# Altium PCB 会车驱动.PcbDoc (part 1 of 2)
Units mil, origin at the board's own origin, x right, y up, seen from the top; angles counter-clockwise.
Board outline 3149.61 x 2559.06 mil, 2 copper layers (Top Layer, Bottom Layer); 71 components, 50 nets, 207 pads, 87 vias.
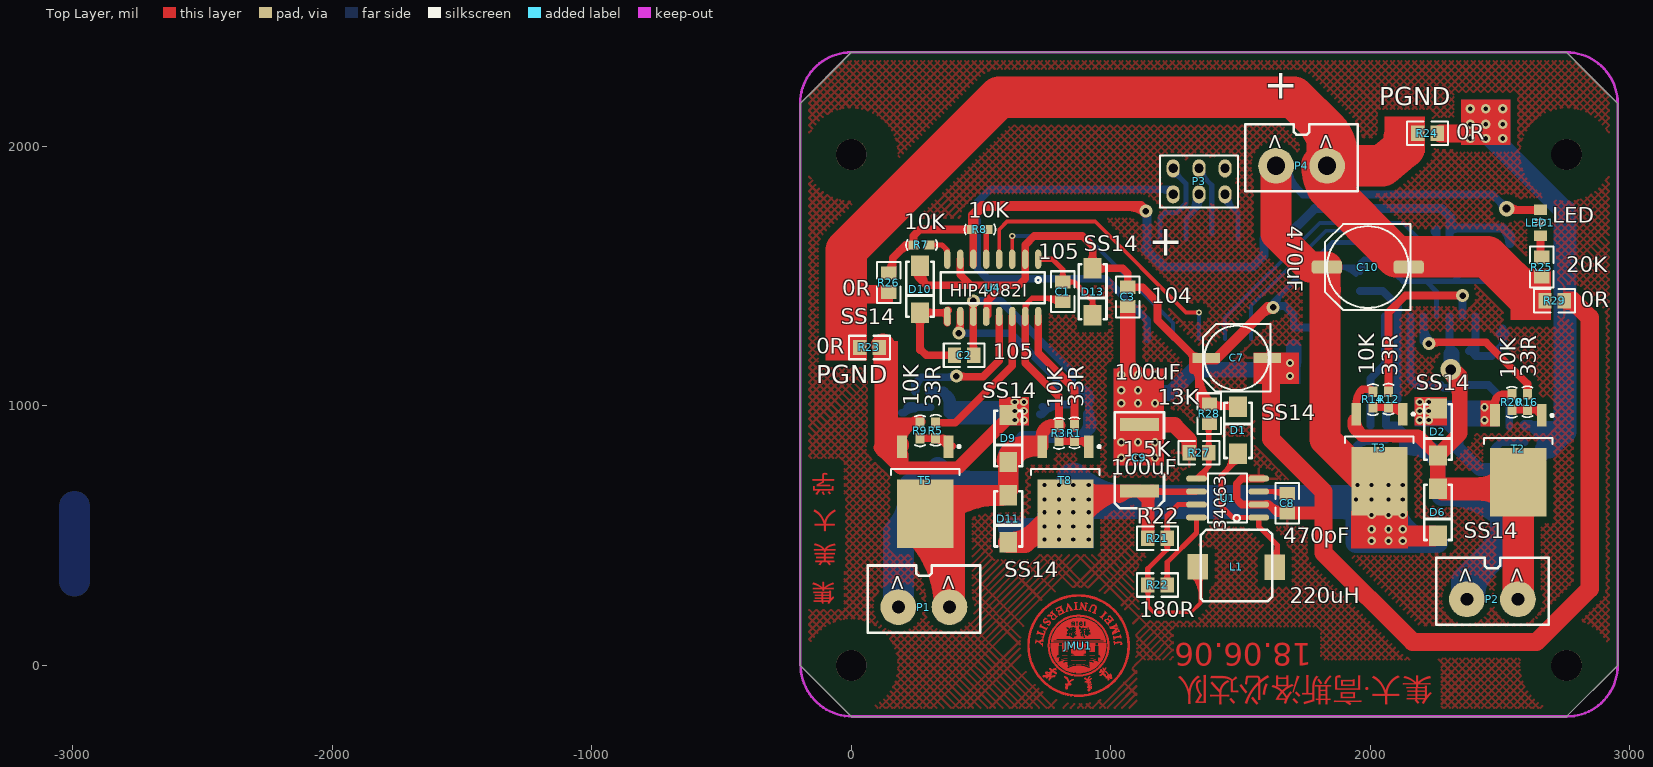
[diagram p0: Top Layer view]
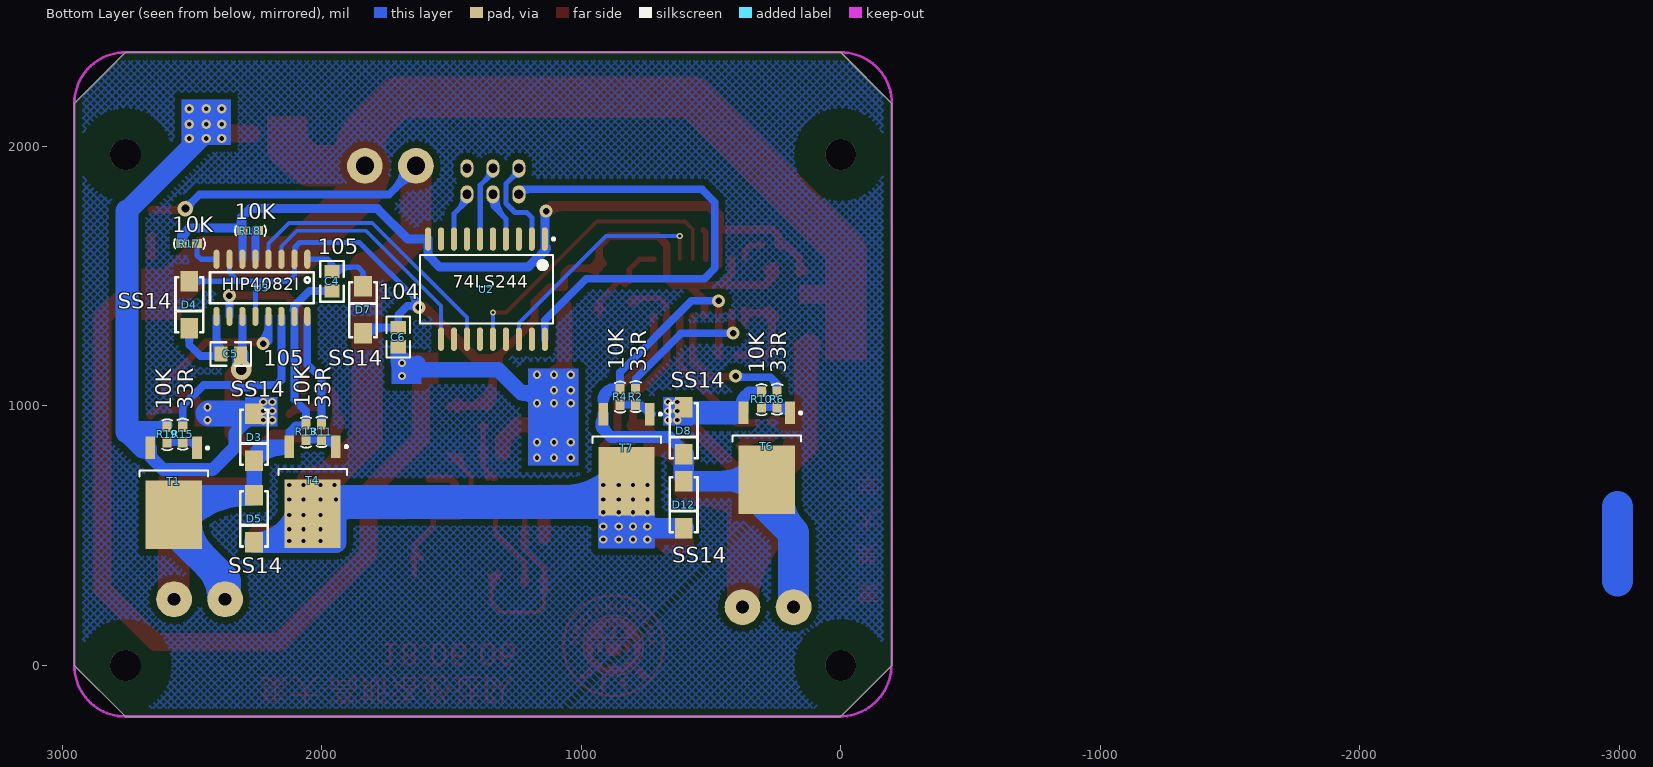
[diagram p1: Bottom Layer view, seen from below]
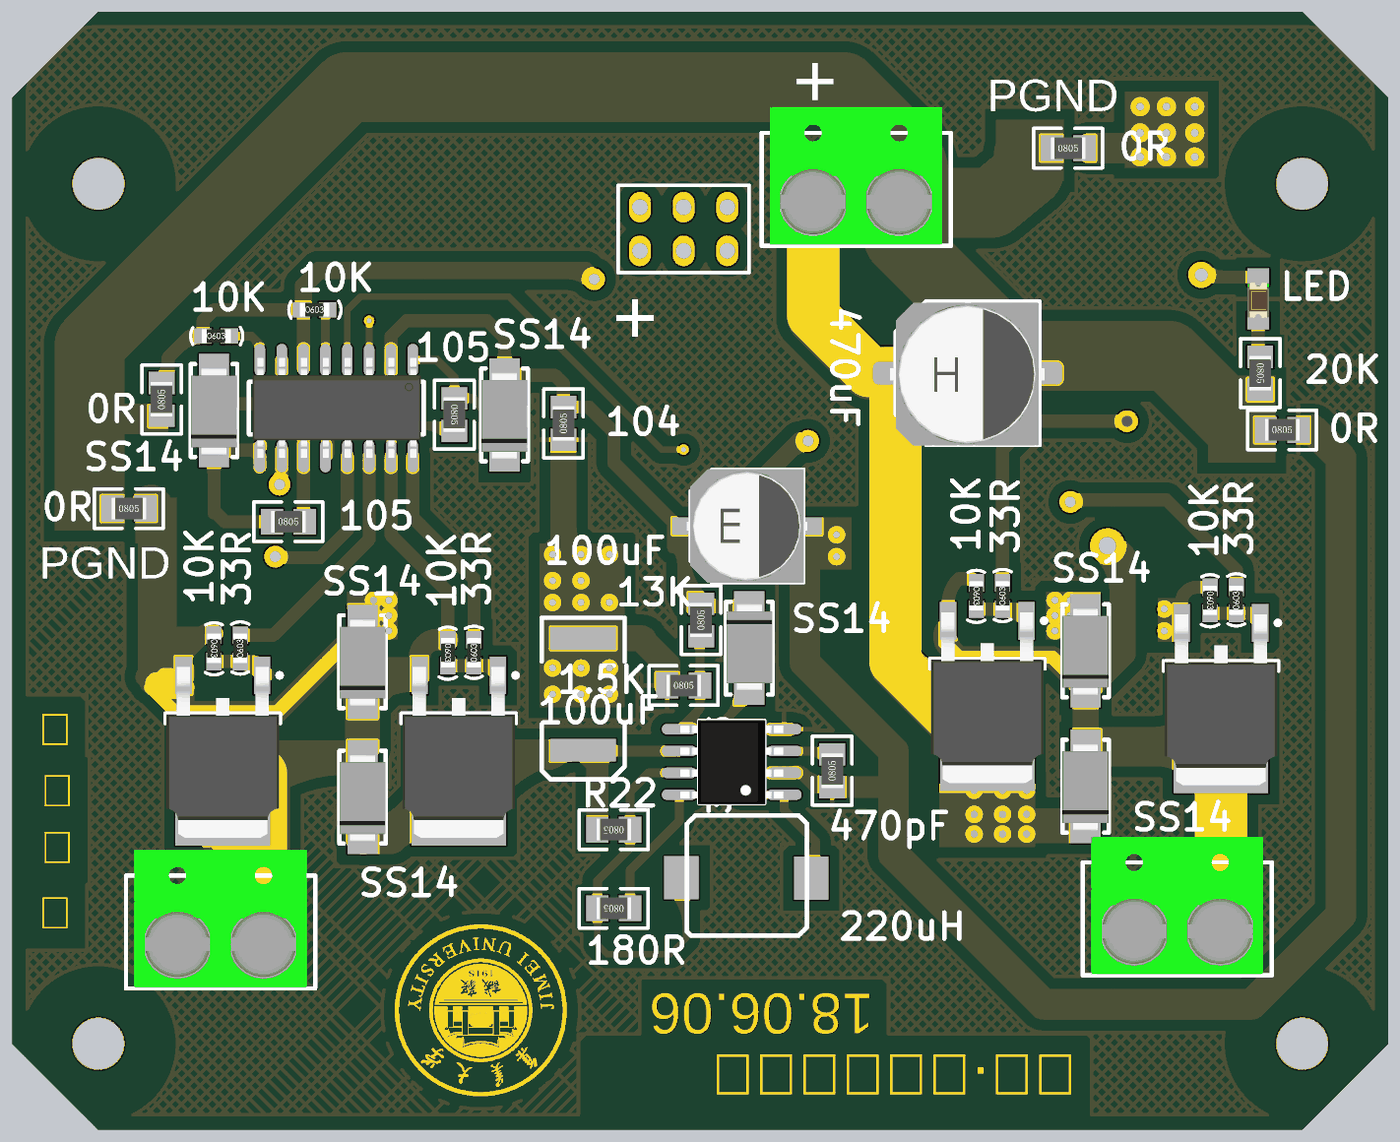
[diagram p3: 3D render of the assembled board from above, using the file's embedded part models]
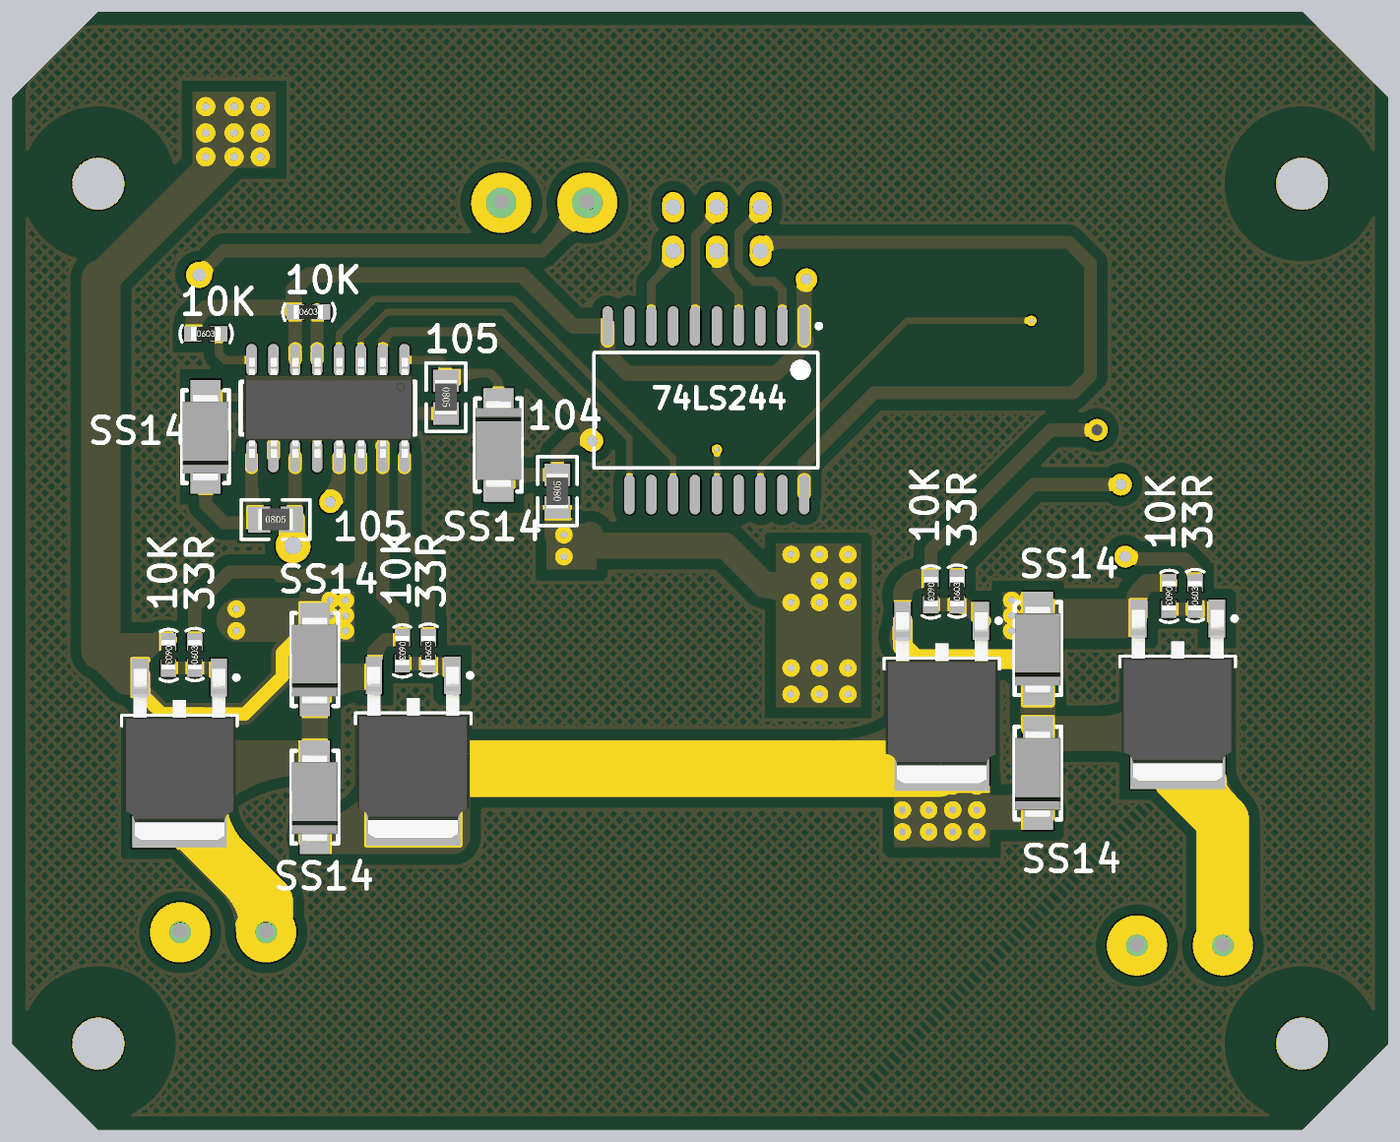
[diagram p4: 3D render of the assembled board from below, using the file's embedded part models]

## Layer stack, top to bottom
Top Layer: signal copper 1.4
Dielectric: dielectric 12.6, FR-4, Dk 4.8
Bottom Layer: signal copper 1.4

## Board outline
2755.91,-196.85 2952.76,0 2952.76,2165.35 2755.91,2362.2 0,2362.2 -196.85,2165.35 -196.85,0 0,-196.85

## Design rules (kind name [scope] priority, off if disabled: settings)
Clearance hold [HasPad('free-1') or HasPad('free-2')  or HasPad('free-3') oR HasPad('free-4') vs inpolygon] p1: gap=118.11
Clearance inpolygon [inpolygon] p2: gap=25
Clearance main_road_clearance [InNetClass('POWER_OR_GND')] p3: gap=15
Clearance [All] p4: gap=10
PolygonConnect PGND2 [InNet('PGND2')] p1: connectstyle=Direct reliefconductorwidth=10 reliefentries=4 polygonreliefangle="90 Angle"
PolygonConnect PGND1 [InNet('PGND1')] p2: connectstyle=Direct reliefconductorwidth=10 reliefentries=4 polygonreliefangle="90 Angle"
PolygonConnect [All] p3: connectstyle=Relief reliefconductorwidth=10 reliefentries=4 polygonreliefangle="90 Angle"
RoutingVias [All] p1: holewidth=28 width=50 viastyle="Through Hole" minholewidth=16 minwidth=32 maxholewidth=50 maxwidth=90
SilkscreenOverComponentPads [IsPad] p1: minsilkscreentomaskgap=10
SolderMaskExpansion [All] p1: expansion=4
Width main_road_width [InNetClass('POWER_OR_GND')] p1: maxlimit=170 minlimit=20 preferedwidth=80
Width [All] p2: maxlimit=30 minlimit=10 preferedwidth=15
27 further rules are at their usual default settings.

## Classes and differential pairs
net class POWER_OR_GND: 5V 7.2V 12V AGND DGND GND M1 M2 M3 M4 PGND1 PGND2

## Components (designator, comment, footprint, x,y, rotation, side; value= is the part's Value field where it differs from the comment)
C1 "105" 0805 815,1440 r270 top
C2 "105" 0805 435,1195 r0 top
C3 "104" 0805 1065,1420 r90 top
C4 "105" 0805 1960,1480 r270 bottom
C5 "105" 0805 2350,1200 r180 bottom
C6 "104" 0805 1705,1265 r90 bottom
C7 "100uF" ED6.3 1485,1185 r0 top
C8 "470pF" 0805 1680,625 r90 top
C9 "100uF" "Pol Cap(220uF)" 1110,800 r90 top
C10 "470uF" ED8 1990,1535 r0 top
D1 "SS14" 二极管 1490,910 r90 top
D2 "SS14" 二极管 2260,895 r270 top
D3 "SS14" 二极管 2260,875 r270 bottom
D4 "SS14" 二极管 2510,1385 r270 bottom
D5 "SS14" 二极管 2260,560 r270 bottom
D6 "SS14" 二极管 2260,585 r270 top
D7 "SS14" 二极管 1840,1375 r90 bottom
D8 "SS14" 二极管 605,900 r270 bottom
D9 "SS14" 二极管 605,870 r270 top
D10 "SS14" 二极管 265,1445 r270 top
D11 "SS14" 二极管 605,560 r270 top
D12 "SS14" 二极管 605,615 r270 bottom
D13 "SS14" 二极管 930,1435 r270 top
JMU1 "JMU" JMU_logo（1） 875,75 r180 top
L1 "220uH" 电感（220uh） 1485,385 r0 top
LED1 "LED" LED(0805) 2655,1705 r270 top
P1 "*" 接线端子#1 280,225 r180 top
P2 "*" 接线端子#1 2470,255 r180 top
P3 "Header 3X2" HDR2X3 1240,1815 r0 top
P4 "*" 接线端子#2 1735,1925 r180 top
R1 "33R" 0603 860,895 r90 top
R2 "33R" 0603 790,1035 r90 bottom
R3 "10K" 0603 800,895 r270 top
R4 "10K" 0603 850,1035 r270 bottom
R5 "33R" 0603 325,905 r90 top
R6 "33R" 0603 245,1025 r90 bottom
R7 "10K" 0603 270,1620 r0 top
R8 "10K" 0603 495,1680 r0 top
R9 "10K" 0603 265,905 r270 top
R10 "10K" 0603 305,1025 r270 bottom
R11 "33R" 0603 2000,900 r90 bottom
R12 "33R" 0603 2070,1025 r90 top
R13 "10K" 0603 2060,900 r270 bottom
R14 "10K" 0603 2010,1025 r270 top
R15 "33R" 0603 2535,890 r90 bottom
R16 "33R" 0603 2605,1015 r90 top
R17 "10K" 0603 2510,1625 r180 bottom
R18 "10K" 0603 2275,1675 r180 bottom
R19 "10K" 0603 2595,890 r270 bottom
R20 "10K" 0603 2545,1015 r270 top
R21 "R22" 0805 1180,490 r180 top
R22 "180R" 0805 1180,310 r180 top
R23 "0R" 0805 70,1225 r0 top
R24 "0R" 0805 2220,2050 r0 top
R25 "20K" 0805 2660,1535 r270 top
R26 "0R" 0805 145,1475 r90 top
R27 "1.5K" 0805 1340,820 r0 top
R28 "13K" 0805 1380,970 r90 top
R29 "0R" 0805 2710,1405 r0 top
T1 "IRLR7843" IRLR7843(MOS) 2550,620 r270 bottom
T2 "IRLR7843" IRLR7843(MOS) 2590,745 r270 top
T3 "IRLR7843" IRLR7843(MOS) 2055,750 r270 top
T4 "IRLR7843" IRLR7843(MOS) 2015,625 r270 bottom
T5 "IRLR7843" IRLR7843(MOS) 305,625 r270 top
T6 "IRLR7843" IRLR7843(MOS) 265,755 r270 bottom
T7 "IRLR7843" IRLR7843(MOS) 805,750 r270 bottom
T8 "IRLR7843" IRLR7843(MOS) 845,625 r270 top
U1 "34063" MA34063 1445,640 r180 top
U2 "74LS244" 74LS244D 1365,1450 r270 bottom
U3 "HIP4082I" HIP4082I 2215,1455 r270 bottom
U4 "HIP4082I" HIP4082I 560,1455 r270 top

## Footprints (in the part's own frame and the unit in brackets; to place one, negate y for a bottom-side part, rotate by r counter-clockwise, add the part's x,y. Pads: shape width x height; smd on the part's side, far side on the other; paste and mask are expansions set on the pad)
74LS244D [mm]
  oval 2.3x0.6 smd: 1(-4.9,5.715) 2(-4.9,4.445) 3(-4.9,3.175) 4(-4.9,1.905) 5(-4.9,0.635) 6(-4.9,-0.635) 7(-4.9,-1.905) 8(-4.9,-3.175) 9(-4.9,-4.445) 10(-4.9,-5.715) 12(4.9,-4.445) 13(4.9,-3.175) 14(4.9,-1.905) 15(4.9,-0.635) 16(4.9,0.635) 17(4.9,1.905) 18(4.9,3.175) 19(4.9,4.445) 20(4.9,5.715)
  silkscreen extent -5.02,-6.5 3.35,6.69, body extent -3.8,-6.5 3.8,6.5, height 2.65
0603 [mil]
  rect 40x35 smd: 1(-30,0) 2(30,0)
  silkscreen extent -59,-20 61,20, body extent -33,-16 33,16, height 22
0805 [mm]
  rect 1.3x1.5 smd: 1(-0.95,0) 2(0.95,0)
  silkscreen extent -2,-1.15 2,1.15, body extent -1,-0.63 1,0.63, height 0.55
ED6.3 [mm]
  rect 2.7x1 smd: 1(-3,0) 2(3,0)
  silkscreen extent -3.3,-3.3 3.3,3.3, body extent -3.5,-3.3 3.5,3.3, height 5.2
ED8 [mm]
  rrect50% 3x1.3 smd: 1(-4,0) 2(4,0)
  silkscreen extent -4.2,-4.2 4.2,4.2, body extent -4.52,-4.22 4.48,4.08, height 10.5
HDR2X3 [mil] "Connector; Heade"
  oval 50x70 hole 36: 1(0,0) 2(0,100) 3(100,0) 4(100,100) 5(200,0) 6(200,100)
  silkscreen extent -50,-50 250,150
HIP4082I [mil]
  oval 74x24 smd: 1(-110,160) 2(-110,110) 3(-110,60) 4(-110,10) 5(-110,-40) 6(-110,-90) 7(-110,-140) 8(-110,-190) 9(110,-190) 10(110,-140) 11(110,-90) 12(110,-40) 13(110,10) 14(110,60) 15(110,110) 16(110,160)
  silkscreen extent -60,-215 60,185, body extent -115,-207 113,179, height 69
IRLR7843(MOS) [mm]
  rect 2.2x0.95 smd: 1(-5.543,1.772) 3(-5.543,-2.788)
  rect 6.7x5.5 smd: 2(1.007,-0.508)
  silkscreen extent -5.67,-3.86 -2.74,2.92, body extent -6.04,-3.78 3.9,2.76, height 2.39
JMU_logo（1） [mil]
  Top Layer region: 917 vertices and 1 holes, not listed, extent -197.2,-197.9 195.8,195.1
  Top Layer region: 557 vertices and 1 holes, not listed, extent -119.2,-119.9 117.8,117.1
  Top Layer region: 309 vertices and 19 holes, not listed, extent -107.2,-10.9 105.8,105.1
  Top Layer region: 261 vertices and 22 holes, not listed, extent -106.2,-107.9 104.8,-13.9
  Top Layer region: 251 vertices and 0 holes, not listed, extent 83.8,85.1 136.8,124.1
  Top Layer region: 219 vertices and 1 holes, not listed, extent -130.2,83.1 -83.2,132.1
  Top Layer region: 241 vertices and 4 holes, not listed, extent -52.2,117.1 -25.2,174.1
  Top Layer region: 155 vertices and 0 holes, not listed, extent 18.8,117.1 55.8,167.1
  Top Layer region: 195 vertices and 0 holes, not listed, extent -160.2,-85.9 -119.2,-42.9
  Top Layer region: 139 vertices and 1 holes, not listed, extent 79.8,-134.9 119.8,-100.9
  Top Layer region: -29.2,-136.9 -24.2,-136.9 -24.2,-137.9 -23.2,-137.9 -23.2,-139.9 -22.2,-139.9 -22.2,-141.9 -21.2,-141.9 -21.2,-142.9 -20.2,-142.9 -20.2,-144.9 -19.2,-144.9 -19.2,-145.9 -18.2,-145.9 -18.2,-147.9 -17.2,-147.9 -17.2,-149.9 -16.2,-149.9 -16.2,-150.9 -15.2,-150.9 -15.2,-152.9 -14.2,-152.9 -14.2,-154.9 -13.2,-154.9 -13.2,-155.9 -12.2,-155.9 -12.2,-157.9 -11.2,-157.9 -11.2,-149.9 -10.2,-149.9 -10.2,-140.9 -13.2,-140.9 -13.2,-138.9 -6.2,-138.9 -6.2,-139.9 -2.2,-139.9 -2.2,-140.9 -3.2,-140.9 -3.2,-141.9 -6.2,-141.9 -6.2,-143.9 -7.2,-143.9 -7.2,-149.9 -8.2,-149.9 -8.2,-157.9 -9.2,-157.9 -9.2,-165.9 -10.2,-165.9 -10.2,-167.9 -12.2,-167.9 -12.2,-165.9 -13.2,-165.9 -13.2,-164.9 -14.2,-164.9 -14.2,-162.9 -15.2,-162.9 -15.2,-161.9 -16.2,-161.9 -16.2,-159.9 -17.2,-159.9 -17.2,-157.9 -18.2,-157.9 -18.2,-156.9 -19.2,-156.9 -19.2,-154.9 -20.2,-154.9 -20.2,-153.9 -21.2,-153.9 -21.2,-151.9 -22.2,-151.9 -22.2,-149.9 -23.2,-149.9 -23.2,-147.9 -24.2,-147.9 -24.2,-146.9 -25.2,-146.9 -25.2,-144.9 -26.2,-144.9 -26.2,-148.9 -27.2,-148.9 -27.2,-156.9 -28.2,-156.9 -28.2,-163.9 -25.2,-163.9 -25.2,-165.9 -33.2,-165.9 -33.2,-164.9 -36.2,-164.9 -36.2,-163.9 -35.2,-163.9 -35.2,-162.9 -32.2,-162.9 -32.2,-161.9 -31.2,-161.9 -31.2,-156.9 -30.2,-156.9 -30.2,-148.9 -29.2,-148.9 -29.2,-141.9 -28.2,-141.9 -28.2,-140.9 -29.2,-140.9 -29.2,-138.9 -31.2,-138.9 -31.2,-137.9 -32.2,-137.9 -32.2,-135.9 -29.2,-135.9
  Top Layer region: 177 vertices and 0 holes, not listed, extent 51.8,-154.9 86.8,-118.9
  Top Layer region: 215 vertices and 0 holes, not listed, extent -137.2,-116.9 -100.2,-79.9
  Top Layer region: -65.2,-124.9 -63.2,-124.9 -63.2,-125.9 -60.2,-125.9 -60.2,-126.9 -58.2,-126.9 -58.2,-127.9 -55.2,-127.9 -55.2,-128.9 -54.2,-128.9 -54.2,-130.9 -56.2,-130.9 -56.2,-129.9 -58.2,-129.9 -58.2,-130.9 -59.2,-130.9 -59.2,-132.9 -60.2,-132.9 -60.2,-135.9 -61.2,-135.9 -61.2,-138.9 -62.2,-138.9 -62.2,-140.9 -63.2,-140.9 -63.2,-143.9 -64.2,-143.9 -64.2,-146.9 -65.2,-146.9 -65.2,-151.9 -64.2,-151.9 -64.2,-152.9 -63.2,-152.9 -63.2,-153.9 -62.2,-153.9 -62.2,-154.9 -60.2,-154.9 -60.2,-155.9 -54.2,-155.9 -54.2,-154.9 -53.2,-154.9 -53.2,-153.9 -52.2,-153.9 -52.2,-152.9 -51.2,-152.9 -51.2,-151.9 -50.2,-151.9 -50.2,-149.9 -49.2,-149.9 -49.2,-146.9 -48.2,-146.9 -48.2,-143.9 -47.2,-143.9 -47.2,-141.9 -46.2,-141.9 -46.2,-138.9 -45.2,-138.9 -45.2,-134.9 -46.2,-134.9 -46.2,-133.9 -47.2,-133.9 -47.2,-131.9 -45.2,-131.9 -45.2,-132.9 -42.2,-132.9 -42.2,-133.9 -40.2,-133.9 -40.2,-134.9 -37.2,-134.9 -37.2,-136.9 -41.2,-136.9 -41.2,-137.9 -42.2,-137.9 -42.2,-139.9 -43.2,-139.9 -43.2,-141.9 -44.2,-141.9 -44.2,-144.9 -45.2,-144.9 -45.2,-147.9 -46.2,-147.9 -46.2,-149.9 -47.2,-149.9 -47.2,-151.9 -48.2,-151.9 -48.2,-153.9 -49.2,-153.9 -49.2,-155.9 -51.2,-155.9 -51.2,-156.9 -52.2,-156.9 -52.2,-157.9 -54.2,-157.9 -54.2,-158.9 -60.2,-158.9 -60.2,-157.9 -63.2,-157.9 -63.2,-156.9 -65.2,-156.9 -65.2,-155.9 -67.2,-155.9 -67.2,-154.9 -68.2,-154.9 -68.2,-153.9 -69.2,-153.9 -69.2,-151.9 -70.2,-151.9 -70.2,-144.9 -69.2,-144.9 -69.2,-141.9 -68.2,-141.9 -68.2,-138.9 -67.2,-138.9 -67.2,-136.9 -66.2,-136.9 -66.2,-133.9 -65.2,-133.9 -65.2,-130.9 -64.2,-130.9 -64.2,-126.9 -66.2,-126.9 -66.2,-123.9 -65.2,-123.9
  Top Layer region: 138.8,-0.9 139.8,-0.9 139.8,-3.9 140.8,-3.9 140.8,-4.9 142.8,-4.9 142.8,-5.9 143.8,-5.9 143.8,-6.9 144.8,-6.9 144.8,-7.9 145.8,-7.9 145.8,-8.9 147.8,-8.9 147.8,-9.9 148.8,-9.9 148.8,-10.9 149.8,-10.9 149.8,-11.9 150.8,-11.9 150.8,-12.9 152.8,-12.9 152.8,-13.9 160.8,-13.9 160.8,-14.9 162.8,-14.9 162.8,-13.9 163.8,-13.9 163.8,-10.9 165.8,-10.9 165.8,-15.9 164.8,-15.9 164.8,-23.9 162.8,-23.9 162.8,-20.9 161.8,-20.9 161.8,-19.9 156.8,-19.9 156.8,-18.9 151.8,-18.9 151.8,-19.9 149.8,-19.9 149.8,-20.9 147.8,-20.9 147.8,-21.9 145.8,-21.9 145.8,-22.9 143.8,-22.9 143.8,-23.9 142.8,-23.9 142.8,-24.9 140.8,-24.9 140.8,-25.9 138.8,-25.9 138.8,-26.9 137.8,-26.9 137.8,-27.9 136.8,-27.9 136.8,-29.9 134.8,-29.9 134.8,-21.9 135.8,-21.9 135.8,-16.9 137.8,-16.9 137.8,-19.9 139.8,-19.9 139.8,-18.9 141.8,-18.9 141.8,-17.9 143.8,-17.9 143.8,-16.9 145.8,-16.9 145.8,-15.9 147.8,-15.9 147.8,-14.9 148.8,-14.9 148.8,-13.9 147.8,-13.9 147.8,-12.9 146.8,-12.9 146.8,-11.9 144.8,-11.9 144.8,-10.9 143.8,-10.9 143.8,-9.9 142.8,-9.9 142.8,-8.9 140.8,-8.9 140.8,-7.9 138.8,-7.9 138.8,-9.9 136.8,-9.9 136.8,-3.9 137.8,-3.9 137.8,0.1 138.8,0.1
  Top Layer region: 114.8,-79.9 116.8,-79.9 116.8,-80.9 118.8,-80.9 118.8,-81.9 120.8,-81.9 120.8,-83.9 112.8,-83.9 112.8,-84.9 111.8,-84.9 111.8,-85.9 110.8,-85.9 110.8,-86.9 109.8,-86.9 109.8,-89.9 110.8,-89.9 110.8,-90.9 111.8,-90.9 111.8,-91.9 116.8,-91.9 116.8,-90.9 118.8,-90.9 118.8,-89.9 120.8,-89.9 120.8,-88.9 123.8,-88.9 123.8,-87.9 131.8,-87.9 131.8,-88.9 132.8,-88.9 132.8,-89.9 133.8,-89.9 133.8,-90.9 134.8,-90.9 134.8,-91.9 135.8,-91.9 135.8,-99.9 134.8,-99.9 134.8,-100.9 133.8,-100.9 133.8,-102.9 132.8,-102.9 132.8,-103.9 131.8,-103.9 131.8,-104.9 129.8,-104.9 129.8,-107.9 127.8,-107.9 127.8,-106.9 125.8,-106.9 125.8,-105.9 123.8,-105.9 123.8,-104.9 120.8,-104.9 120.8,-102.9 128.8,-102.9 128.8,-101.9 130.8,-101.9 130.8,-100.9 131.8,-100.9 131.8,-99.9 132.8,-99.9 132.8,-95.9 131.8,-95.9 131.8,-93.9 128.8,-93.9 128.8,-92.9 126.8,-92.9 126.8,-93.9 123.8,-93.9 123.8,-94.9 121.8,-94.9 121.8,-95.9 119.8,-95.9 119.8,-96.9 115.8,-96.9 115.8,-97.9 113.8,-97.9 113.8,-96.9 110.8,-96.9 110.8,-95.9 109.8,-95.9 109.8,-94.9 108.8,-94.9 108.8,-93.9 107.8,-93.9 107.8,-91.9 106.8,-91.9 106.8,-87.9 107.8,-87.9 107.8,-85.9 108.8,-85.9 108.8,-83.9 109.8,-83.9 109.8,-82.9 110.8,-82.9 110.8,-81.9 112.8,-81.9 112.8,-78.9 114.8,-78.9
  Top Layer region: 48.8,-132.9 47.8,-132.9 47.8,-133.9 46.8,-133.9 46.8,-137.9 45.8,-137.9 45.8,-143.9 44.8,-143.9 44.8,-149.9 43.8,-149.9 43.8,-154.9 42.8,-154.9 42.8,-155.9 43.8,-155.9 43.8,-156.9 42.8,-156.9 42.8,-161.9 41.8,-161.9 41.8,-163.9 40.8,-163.9 40.8,-162.9 39.8,-162.9 39.8,-161.9 38.8,-161.9 38.8,-160.9 37.8,-160.9 37.8,-159.9 36.8,-159.9 36.8,-157.9 35.8,-157.9 35.8,-156.9 34.8,-156.9 34.8,-155.9 33.8,-155.9 33.8,-153.9 32.8,-153.9 32.8,-152.9 31.8,-152.9 31.8,-151.9 30.8,-151.9 30.8,-149.9 29.8,-149.9 29.8,-148.9 28.8,-148.9 28.8,-146.9 27.8,-146.9 27.8,-145.9 26.8,-145.9 26.8,-144.9 25.8,-144.9 25.8,-142.9 24.8,-142.9 24.8,-141.9 23.8,-141.9 23.8,-140.9 22.8,-140.9 22.8,-139.9 19.8,-139.9 19.8,-137.9 22.8,-137.9 22.8,-136.9 26.8,-136.9 26.8,-135.9 30.8,-135.9 30.8,-134.9 31.8,-134.9 31.8,-137.9 28.8,-137.9 28.8,-138.9 29.8,-138.9 29.8,-140.9 30.8,-140.9 30.8,-142.9 31.8,-142.9 31.8,-143.9 32.8,-143.9 32.8,-144.9 33.8,-144.9 33.8,-146.9 34.8,-146.9 34.8,-147.9 35.8,-147.9 35.8,-148.9 36.8,-148.9 36.8,-150.9 37.8,-150.9 37.8,-151.9 38.8,-151.9 38.8,-152.9 39.8,-152.9 39.8,-153.9 40.8,-153.9 40.8,-148.9 41.8,-148.9 41.8,-143.9 42.8,-143.9 42.8,-136.9 43.8,-136.9 43.8,-134.9 39.8,-134.9 39.8,-132.9 42.8,-132.9 42.8,-131.9 47.8,-131.9 47.8,-130.9 48.8,-130.9
  Top Layer region: 136.8,-32.9 139.8,-32.9 139.8,-33.9 141.8,-33.9 141.8,-35.9 135.8,-35.9 135.8,-37.9 134.8,-37.9 134.8,-39.9 133.8,-39.9 133.8,-41.9 134.8,-41.9 134.8,-42.9 137.8,-42.9 137.8,-43.9 140.8,-43.9 140.8,-44.9 144.8,-44.9 144.8,-45.9 147.8,-45.9 147.8,-46.9 150.8,-46.9 150.8,-47.9 153.8,-47.9 153.8,-48.9 156.8,-48.9 156.8,-47.9 157.8,-47.9 157.8,-45.9 159.8,-45.9 159.8,-48.9 158.8,-48.9 158.8,-51.9 157.8,-51.9 157.8,-55.9 156.8,-55.9 156.8,-58.9 154.8,-58.9 154.8,-54.9 153.8,-54.9 153.8,-53.9 151.8,-53.9 151.8,-52.9 148.8,-52.9 148.8,-51.9 145.8,-51.9 145.8,-50.9 142.8,-50.9 142.8,-49.9 138.8,-49.9 138.8,-48.9 135.8,-48.9 135.8,-47.9 132.8,-47.9 132.8,-46.9 131.8,-46.9 131.8,-49.9 130.8,-49.9 130.8,-53.9 131.8,-53.9 131.8,-55.9 133.8,-55.9 133.8,-56.9 134.8,-56.9 134.8,-57.9 130.8,-57.9 130.8,-56.9 127.8,-56.9 127.8,-55.9 126.8,-55.9 126.8,-53.9 127.8,-53.9 127.8,-49.9 128.8,-49.9 128.8,-46.9 129.8,-46.9 129.8,-43.9 130.8,-43.9 130.8,-40.9 131.8,-40.9 131.8,-37.9 132.8,-37.9 132.8,-33.9 133.8,-33.9 133.8,-31.9 136.8,-31.9
  Top Layer region: -162.2,-4.9 -161.2,-4.9 -161.2,-6.9 -162.2,-6.9 -162.2,-7.9 -163.2,-7.9 -163.2,-8.9 -165.2,-8.9 -165.2,-10.9 -154.2,-10.9 -154.2,-9.9 -142.2,-9.9 -142.2,-8.9 -140.2,-8.9 -140.2,-4.9 -138.2,-4.9 -138.2,-11.9 -137.2,-11.9 -137.2,-17.9 -138.2,-17.9 -138.2,-18.9 -139.2,-18.9 -139.2,-15.9 -140.2,-15.9 -140.2,-14.9 -150.2,-14.9 -150.2,-15.9 -164.2,-15.9 -164.2,-14.9 -165.2,-14.9 -165.2,-13.9 -166.2,-13.9 -166.2,-12.9 -167.2,-12.9 -167.2,-10.9 -168.2,-10.9 -168.2,-6.9 -167.2,-6.9 -167.2,-4.9 -166.2,-4.9 -166.2,-3.9 -162.2,-3.9
  Top Layer region: 125.8,-59.9 126.8,-59.9 126.8,-60.9 125.8,-60.9 125.8,-63.9 126.8,-63.9 126.8,-64.9 128.8,-64.9 128.8,-65.9 130.8,-65.9 130.8,-66.9 132.8,-66.9 132.8,-67.9 134.8,-67.9 134.8,-68.9 136.8,-68.9 136.8,-69.9 138.8,-69.9 138.8,-70.9 140.8,-70.9 140.8,-71.9 142.8,-71.9 142.8,-72.9 144.8,-72.9 144.8,-73.9 147.8,-73.9 147.8,-72.9 148.8,-72.9 148.8,-71.9 150.8,-71.9 150.8,-72.9 149.8,-72.9 149.8,-74.9 148.8,-74.9 148.8,-77.9 147.8,-77.9 147.8,-79.9 146.8,-79.9 146.8,-81.9 145.8,-81.9 145.8,-83.9 143.8,-83.9 143.8,-78.9 142.8,-78.9 142.8,-77.9 140.8,-77.9 140.8,-76.9 137.8,-76.9 137.8,-75.9 136.8,-75.9 136.8,-74.9 134.8,-74.9 134.8,-73.9 132.8,-73.9 132.8,-72.9 130.8,-72.9 130.8,-71.9 128.8,-71.9 128.8,-70.9 126.8,-70.9 126.8,-69.9 124.8,-69.9 124.8,-68.9 122.8,-68.9 122.8,-69.9 121.8,-69.9 121.8,-70.9 120.8,-70.9 120.8,-71.9 119.8,-71.9 119.8,-70.9 118.8,-70.9 118.8,-69.9 119.8,-69.9 119.8,-67.9 120.8,-67.9 120.8,-65.9 121.8,-65.9 121.8,-63.9 122.8,-63.9 122.8,-61.9 123.8,-61.9 123.8,-59.9 124.8,-59.9 124.8,-58.9 125.8,-58.9
  Top Layer region: -136.2,-28.9 -135.2,-28.9 -135.2,-33.9 -134.2,-33.9 -134.2,-37.9 -136.2,-37.9 -136.2,-35.9 -137.2,-35.9 -137.2,-34.9 -142.2,-34.9 -142.2,-35.9 -147.2,-35.9 -147.2,-36.9 -152.2,-36.9 -152.2,-37.9 -157.2,-37.9 -157.2,-38.9 -160.2,-38.9 -160.2,-39.9 -161.2,-39.9 -161.2,-43.9 -162.2,-43.9 -162.2,-42.9 -163.2,-42.9 -163.2,-37.9 -164.2,-37.9 -164.2,-32.9 -165.2,-32.9 -165.2,-30.9 -164.2,-30.9 -164.2,-29.9 -163.2,-29.9 -163.2,-31.9 -162.2,-31.9 -162.2,-32.9 -161.2,-32.9 -161.2,-33.9 -160.2,-33.9 -160.2,-32.9 -154.2,-32.9 -154.2,-31.9 -150.2,-31.9 -150.2,-30.9 -144.2,-30.9 -144.2,-29.9 -140.2,-29.9 -140.2,-28.9 -138.2,-28.9 -138.2,-24.9 -136.2,-24.9
  Top Layer region: -92.2,-104.9 -91.2,-104.9 -91.2,-105.9 -90.2,-105.9 -90.2,-106.9 -89.2,-106.9 -89.2,-107.9 -88.2,-107.9 -88.2,-108.9 -86.2,-108.9 -86.2,-109.9 -85.2,-109.9 -85.2,-110.9 -84.2,-110.9 -84.2,-111.9 -83.2,-111.9 -83.2,-113.9 -85.2,-113.9 -85.2,-112.9 -88.2,-112.9 -88.2,-113.9 -89.2,-113.9 -89.2,-114.9 -90.2,-114.9 -90.2,-115.9 -91.2,-115.9 -91.2,-116.9 -92.2,-116.9 -92.2,-118.9 -93.2,-118.9 -93.2,-119.9 -94.2,-119.9 -94.2,-120.9 -95.2,-120.9 -95.2,-121.9 -96.2,-121.9 -96.2,-122.9 -97.2,-122.9 -97.2,-124.9 -98.2,-124.9 -98.2,-125.9 -99.2,-125.9 -99.2,-126.9 -100.2,-126.9 -100.2,-127.9 -101.2,-127.9 -101.2,-129.9 -102.2,-129.9 -102.2,-131.9 -101.2,-131.9 -101.2,-132.9 -100.2,-132.9 -100.2,-133.9 -101.2,-133.9 -101.2,-134.9 -102.2,-134.9 -102.2,-133.9 -103.2,-133.9 -103.2,-132.9 -104.2,-132.9 -104.2,-131.9 -105.2,-131.9 -105.2,-130.9 -107.2,-130.9 -107.2,-129.9 -108.2,-129.9 -108.2,-128.9 -109.2,-128.9 -109.2,-127.9 -110.2,-127.9 -110.2,-126.9 -111.2,-126.9 -111.2,-125.9 -108.2,-125.9 -108.2,-126.9 -106.2,-126.9 -106.2,-125.9 -105.2,-125.9 -105.2,-124.9 -104.2,-124.9 -104.2,-123.9 -103.2,-123.9 -103.2,-121.9 -102.2,-121.9 -102.2,-120.9 -101.2,-120.9 -101.2,-119.9 -100.2,-119.9 -100.2,-118.9 -99.2,-118.9 -99.2,-116.9 -98.2,-116.9 -98.2,-115.9 -97.2,-115.9 -97.2,-114.9 -96.2,-114.9 -96.2,-113.9 -95.2,-113.9 -95.2,-112.9 -94.2,-112.9 -94.2,-110.9 -93.2,-110.9 -93.2,-109.9 -92.2,-109.9 -92.2,-106.9 -93.2,-106.9 -93.2,-105.9 -94.2,-105.9 -94.2,-104.9 -93.2,-104.9 -93.2,-103.9 -92.2,-103.9
  Top Layer region: 15.8,-140.9 12.8,-140.9 12.8,-141.9 11.8,-141.9 11.8,-149.9 12.8,-149.9 12.8,-163.9 13.8,-163.9 13.8,-165.9 17.8,-165.9 17.8,-166.9 16.8,-166.9 16.8,-167.9 3.8,-167.9 3.8,-166.9 4.8,-166.9 4.8,-165.9 7.8,-165.9 7.8,-155.9 6.8,-155.9 6.8,-141.9 4.8,-141.9 4.8,-140.9 2.8,-140.9 2.8,-138.9 15.8,-138.9
  Top Layer region: 113.8,129.1 114.8,129.1 114.8,127.1 113.8,127.1 113.8,126.1 112.8,126.1 112.8,125.1 111.8,125.1 111.8,123.1 110.8,123.1 110.8,122.1 109.8,122.1 109.8,121.1 107.8,121.1 107.8,120.1 105.8,120.1 105.8,121.1 104.8,121.1 104.8,124.1 105.8,124.1 105.8,126.1 106.8,126.1 106.8,127.1 107.8,127.1 107.8,128.1 108.8,128.1 108.8,129.1 109.8,129.1 109.8,131.1 113.8,131.1
  Top Layer region: -32.2,130.1 -29.2,130.1 -29.2,129.1 -26.2,129.1 -26.2,128.1 -24.2,128.1 -24.2,127.1 -23.2,127.1 -23.2,124.1 -24.2,124.1 -24.2,123.1 -28.2,123.1 -28.2,124.1 -29.2,124.1 -29.2,126.1 -31.2,126.1 -31.2,127.1 -33.2,127.1 -33.2,128.1 -34.2,128.1 -34.2,130.1 -33.2,130.1 -33.2,131.1 -32.2,131.1
  Top Layer region: -81.2,102.1 -80.2,102.1 -80.2,101.1 -81.2,101.1 -81.2,99.1 -82.2,99.1 -82.2,98.1 -84.2,98.1 -84.2,97.1 -85.2,97.1 -85.2,96.1 -87.2,96.1 -87.2,97.1 -86.2,97.1 -86.2,99.1 -87.2,99.1 -87.2,98.1 -89.2,98.1 -89.2,100.1 -88.2,100.1 -88.2,101.1 -87.2,101.1 -87.2,102.1 -86.2,102.1 -86.2,103.1 -84.2,103.1 -84.2,104.1 -81.2,104.1
  Top Layer region: -95.2,90.1 -93.2,90.1 -93.2,85.1 -94.2,85.1 -94.2,84.1 -96.2,84.1 -96.2,85.1 -97.2,85.1 -97.2,86.1 -98.2,86.1 -98.2,91.1 -95.2,91.1
  Top Layer region: -21.2,-62.9 -22.2,-62.9 -22.2,-63.9 -23.2,-63.9 -23.2,-64.9 -25.2,-64.9 -25.2,-63.9 -26.2,-63.9 -26.2,-61.9 -23.2,-61.9 -23.2,-60.9 -21.2,-60.9
  Top Layer region: -24.2,-52.9 -23.2,-52.9 -23.2,-53.9 -22.2,-53.9 -22.2,-54.9 -23.2,-54.9 -23.2,-55.9 -24.2,-55.9 -24.2,-56.9 -25.2,-56.9 -25.2,-51.9 -24.2,-51.9
  Top Layer region: -34.2,-65.9 -35.2,-65.9 -35.2,-66.9 -38.2,-66.9 -38.2,-64.9 -36.2,-64.9 -36.2,-63.9 -34.2,-63.9
  Top Layer region: 35.8,-46.9 34.8,-46.9 34.8,-47.9 32.8,-47.9 32.8,-44.9 35.8,-44.9
  Top Layer region: 16.8,-52.9 15.8,-52.9 15.8,-51.9 16.8,-51.9
LED(0805) [mil]
  rect 40x50 smd: 1(-50,0) 2(50,0)
  silkscreen extent -20,-20 20,20, body extent -37,-24 43,25, height 43
MA34063 [mil]
  oval 80x24 smd: 1(-125,70) 2(-125,20) 3(-125,-30) 4(-125,-80) 5(115,-80) 6(115,-30) 7(115,20) 8(115,70)
  silkscreen extent -80,-100 70,90, body extent -123,-101 113,92, height 61
"Pol Cap(220uF)" [mm]
  rect 1.3x3.8 smd: 1(-3.25,0) 2(3.25,0)
  silkscreen extent -4.95,-2.41 4.44,2.41
二极管 [mm]
  rect 2x1.75 smd: 1(-2.413,0) 2(2.187,0)
  silkscreen extent -2.81,-1.35 2.59,1.35, body extent -2.61,-1.34 2.49,1.33, height 2.12
接线端子#1 [mm]
  round 3.5 hole 1.27: 1(-2.5,0) 2(2.5,0)
  silkscreen extent -5.5,-4.06 5.5,2.5, body extent -4.99,-5.56 5.01,2.44, height 11
接线端子#2 [mm]
  round 3.5 hole 1.778: 1(-2.5,0) 2(2.5,0)
  silkscreen extent -5.5,-4.06 5.5,2.5, body extent -4.99,-5.56 5.01,2.44, height 11
电感（220uh） [mm]
  rect 2x2.5 smd: 1(-3.81,-0.127) 2(3.734,-0.152)
  silkscreen extent -3.5,-3.5 3.48,3.5

## Part data
P3: "Header, 3-Pin, Dual row"

## Free pads (board coordinates)
  round 118.11 hole 118.11: 1(0.39,1968.5) 2(0,0) 3(2755.91,0) 4(2755.91,1968.5)

## Via types
v1: diameter 32, hole 16, Top Layer to Bottom Layer, 67 vias
v2: diameter 36, hole 18, Top Layer to Bottom Layer, 9 vias
v3: diameter 50, hole 25, Top Layer to Bottom Layer, 7 vias
v4: diameter 24, hole 12, Top Layer to Bottom Layer, 2 vias
v5: diameter 80, hole 40, Top Layer to Bottom Layer, 1 vias
v6: diameter 60, hole 30, Top Layer to Bottom Layer, 1 vias

## Nets (pads, with @x,y where several pads share a name; then routed paths per layer and width w, separated by ;. In a path a pad name is that pad's centre, name@x,y a point inside that pad or via, vN(x,y) a via of type N, cw(c..) or ccw(c..) an arc to the next point about the centre after c; other vN are vias at no path point)
5V: P3.1 U2.20 | length 1891.4
  Bottom Layer w30: U2.20@1140,1257.09 1140,1330 980,1490 525,1490 485,1530 485,1785 535,1835 1230,1835 P3.1@1240,1825 ; 1191.72,1835 cw(c1191.72,1776.72) P3.1@1232.93,1817.93
7.2V: C9.1 C10.1 D5.2 D6.2 D11.2 D12.2 LED1.1 P4.2 R21.2 T3.2 T4.2 T7.2 T8.2 U1.6 | length 7510.9
  Top Layer w25: C9.1@1112.05,670 U1.6@1330,670 ; C9.1@1168.47,662.79 cw(c1185.87,645.39) 1185.87,670 ; C9.1@1168.47,681.3 ccw(c1195.76,708.6) 1195.76,670
  Top Layer w30: v6@2530,1755 LED1.1@2655,1755 ; v6@2535.61,1770.61 ccw(c2573.28,1808.28) 2573.28,1755
  Top Layer w50: T8.2@797.01,631.51 ccw(c813.47,678.22) T8.2@834.86,633.55 ; T8.2@811.4,618.73 cw(c915.24,544.28) T8.2@915.24,672.05 ; T8.2@835,641.2 cw(c854.53,620.69) T8.2@855.22,649 ; T8.2@847.1,644.31 cw(c869.14,632.29) T8.2@862.05,656.38 ; T8.2@852.04,589.59 cw(c1012.61,474.46) 1012.61,672.05 ; T8.2@892.67,560.46 cw(c1109.98,404.65) C9.1@1110,672.05 ; T8.2@908.64,646.36 cw(c970.64,584.36) 970.64,672.05 ; T8.2@908.64,688.64 ccw(c948.68,728.68) 948.68,672.05 ; T8.2@911.69,672.05 C9.1@1110,672.05 ; 1033.01,651.42 ccw(c1021.39,694.79) C9.1@1060.28,672.34 ; R21.2@1142.6,490 1142.6,639.45 1112.05,670 C9.1@1110,672.05 ; 1142.6,630.51 cw(c1200.75,630.51) C9.1@1159.63,671.63 ; 1142.6,635.46 cw(c1189.51,635.46) C9.1@1159.59,671.59
  Top Layer w80: D11.2@605,473.27 ccw(c605,626.01) 713.01,518.01 ; D11.2@615,473.9 668.9,473.9 ; T8.2@735,540 668.9,473.9 ; T8.2@798.23,498.93 ccw(c752.09,390.72) 668.9,473.9 ; 1975,498.9 D6.2@2245,498.9
  Top Layer w120: P4.2@1636.57,1925 1636.57,1663.43 1765,1535 C10.1@1832.52,1535 ; C10.1@1825,1527.48 1825,1445 ; 1827.52,1447.52 1825,1445 ; T3.2@2035,710.35 1984.65,710.35 1825,870 1825,1445
  Top Layer w130: T8.2@807.87,585.35 T8.2@825,585.35
  Bottom Layer w30: P4.2@1636.57,1880 cw(c1636.57,1787.23) 1702.17,1852.83 ; P4.2@1636.57,1940 P4.2@1636.57,1925 1636.57,1918.43 1740,1815 2470,1815 v6(2525,1760) ; P4.2@1681.57,1925 ccw(c1806.08,1925) 1718.04,1836.96 ; v6@2510,1760 ccw(c2473.79,1760) 2499.39,1785.61 ccw(c2525,1811.21) v6@2525,1775
  Bottom Layer w80: D12.2@605,528.9 721.1,528.9 ; T4.2@1945,585.35 1945,473.9 D5.2@2260,473.9 cw(c2259.99,645.82) T4.2@2098.95,585.63 ; T4.2@2024.01,557.62 ccw(c2144.69,602.73) 2144.69,473.9
  Bottom Layer w130: T7.2@835,630 1920,630 cw(c1920,538.28) T4.2@1998.14,586.32 ; T7.2@855.59,717.33 ccw(c1066.42,928.15) 1066.42,630 ; 1879.79,630 cw(c1879.79,453.76) T4.2@2004.41,578.38
  other v1: 2005,480 2070,480 2125,480 745,485 800,485 855,485 915,485 2005,525 2070,525 2125,525 745,535 800,535 855,535 915,535 2005,580 2070,580 2125,580 745,590 800,590 855,590 915,590 745,640 800,640 855,640 915,640 1945,640 2005,640 2070,640 2125,640 745,695 800,695 855,695 915,695 1950,695 2005,695 2070,695 2125,695